# EAGLE board AndGate (EAGLE 9.7.0)

Size 146.88 x 96.06 mm. Coordinates in mm from the lower left corner, seen from the top.
Outline: 0,0 146.88,0 146.88,96.06 0,96.06 0,0
Copper layers (1*16): Top 0.035mm / dielectric 1.5mm / Bottom 0.035mm
Design rules "default": minimum track width 6mil, minimum drill 0.35mm, track to track 6mil, track to pad 6mil, pad to pad 6mil, via to via 6mil, smd to smd 6mil, copper to edge 40mil, drill to drill 6mil, minimum pad ring 10mil, minimum via ring 8mil, stop-mask expansion 4mil, vias tented up to drill 0mil, thermal gap 10mil

## Footprints (pad centres in the part's own frame; a part is rotated, then mirrored left to right if it is on the bottom)
LEDRD254W60D565H860B = drill 0.981 pad 1.581: 1 -1.27,0; 2 1.27,0
BATTERY-GENERIC = drill 1.118 pad 3.15 octagon: + 2.54,0; - -2.54,0
SWITCH-SPDT-PTH-8.5X3.7MM = drill 1.016 pad 1.88: 1 -2.54,0; 2 0,0; 3 2.54,0
DIP762W53P254L1969H508Q14B = drill 0.743 pad 1.343: 1 -3.81,7.62; 2 -3.81,5.08; 3 -3.81,2.54; 4 -3.81,0; 5 -3.81,-2.54; 6 -3.81,-5.08; 7 -3.81,-7.62; 8 3.81,-7.62; 9 3.81,-5.08; 10 3.81,-2.54; 11 3.81,0; 12 3.81,2.54; 13 3.81,5.08; 14 3.81,7.62

## Placement (x,y rotation side)
D2  RED  [LEDRD254W60D565H860B]  128.27,77.48 180 top
D3  RED  [LEDRD254W60D565H860B]  138.55,32.88 180 top
D4  RED  [LEDRD254W60D565H860B]  67.58,8.05 180 top
D5  RED  [LEDRD254W60D565H860B]  24.93,65.93 180 top
P1  BATTERYGENERIC  [BATTERY-GENERIC]  41.83,81.86 180 top
S1  TOGGLE  [SWITCH-SPDT-PTH-8.5X3.7MM]  85.7,88.77 0 top
S2  TOGGLE  [SWITCH-SPDT-PTH-8.5X3.7MM]  97.43,89.08 0 top
S3  TOGGLE  [SWITCH-SPDT-PTH-8.5X3.7MM]  138.86,59.22 0 top
S4  TOGGLE  [SWITCH-SPDT-PTH-8.5X3.7MM]  139.46,45.67 0 top
S5  TOGGLE  [SWITCH-SPDT-PTH-8.5X3.7MM]  83.42,7.75 0 top
S6  TOGGLE  [SWITCH-SPDT-PTH-8.5X3.7MM]  95.75,8.2 0 top
S7  TOGGLE  [SWITCH-SPDT-PTH-8.5X3.7MM]  7.42,51 0 top
S8  TOGGLE  [SWITCH-SPDT-PTH-8.5X3.7MM]  22.19,52.22 0 top
U2  74HC08_PDIP  [DIP762W53P254L1969H508Q14B]  71.08,46.74 90 top

## Library data of the parts
D2-D5 = Tinkercad; CATEGORY: Opto-Electronic; SUB-CATEGORY: LED; VALUE: LED_RED
P1 S1-S8 U2 = Tinkercad

## Nets
P1+: P1.+ S1.1 S2.1 S3.1 S4.1 S5.1 S6.1 S7.1 S8.1 U2.14
P1-: D2.2 D3.2 D4.2 D5.2 P1.- S1.3 S2.3 S3.3 S4.3 S5.3 S6.3 S7.3 S8.3 U2.7
U2_1A: S7.2 U2.1
U2_1B: S8.2 U2.2
U2_1Y: D4.1 U2.3
U2_2A: S5.2 U2.4
U2_2B: S6.2 U2.5
U2_2Y: D5.1 U2.6
U2_3A: S2.2 U2.9
U2_3B: S1.2 U2.10
U2_3Y: D2.1 U2.8
U2_4A: S3.2 U2.12
U2_4B: S4.2 U2.13
U2_4Y: D3.1 U2.11

## Tracks (layer width: path | path; a pad name or v marks a point on that pad's centre or on a via)
P1+  (9 unrouted)
P1-  (13 unrouted)
U2_1A  (1 unrouted)
U2_1B  (1 unrouted)
U2_1Y  (1 unrouted)
U2_2A  (1 unrouted)
U2_2B  (1 unrouted)
U2_2Y  (1 unrouted)
U2_3A  (1 unrouted)
U2_3B  (1 unrouted)
U2_3Y  (1 unrouted)
U2_4A  (1 unrouted)
U2_4B  (1 unrouted)
U2_4Y  (1 unrouted)